# Altium PCB PCB6.PcbDoc
Units mil, origin at the board's own origin, x right, y up, seen from the top; angles counter-clockwise.
Board outline 5996.8 x 3553.34 mil, 2 copper layers (Top Layer, Bottom Layer); 78 components, 101 nets, 462 pads, 68 vias.
Unrouted connection lines stored in the file: 1.
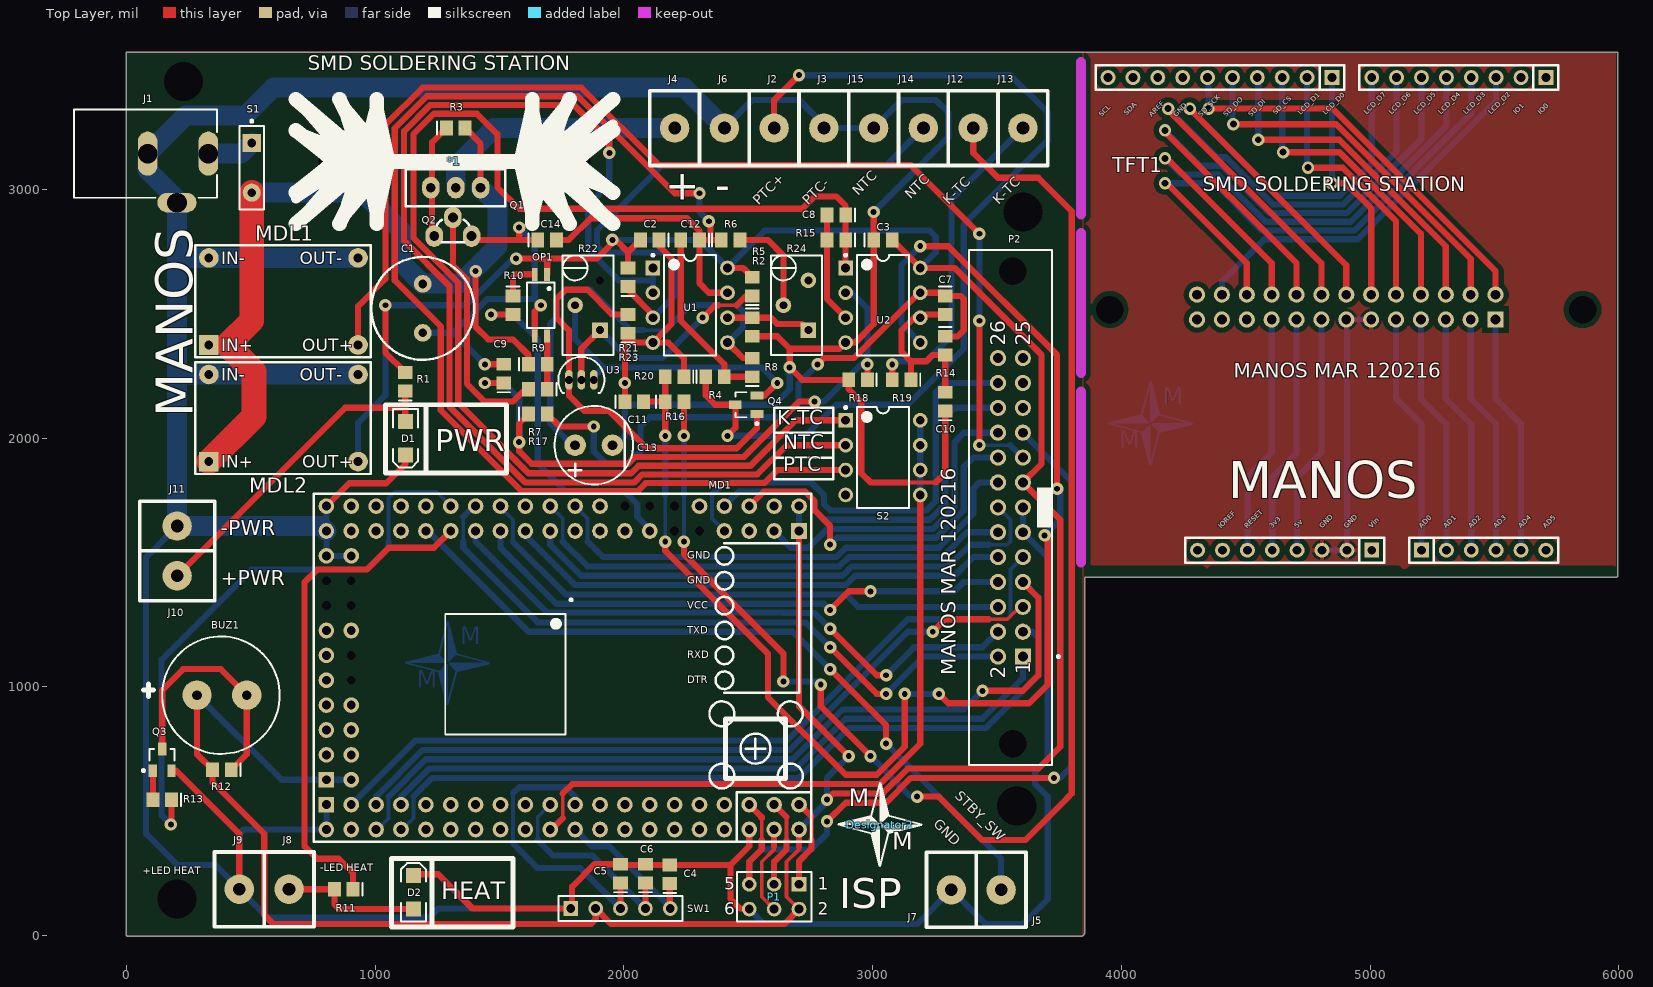
[diagram p0: Top Layer view]
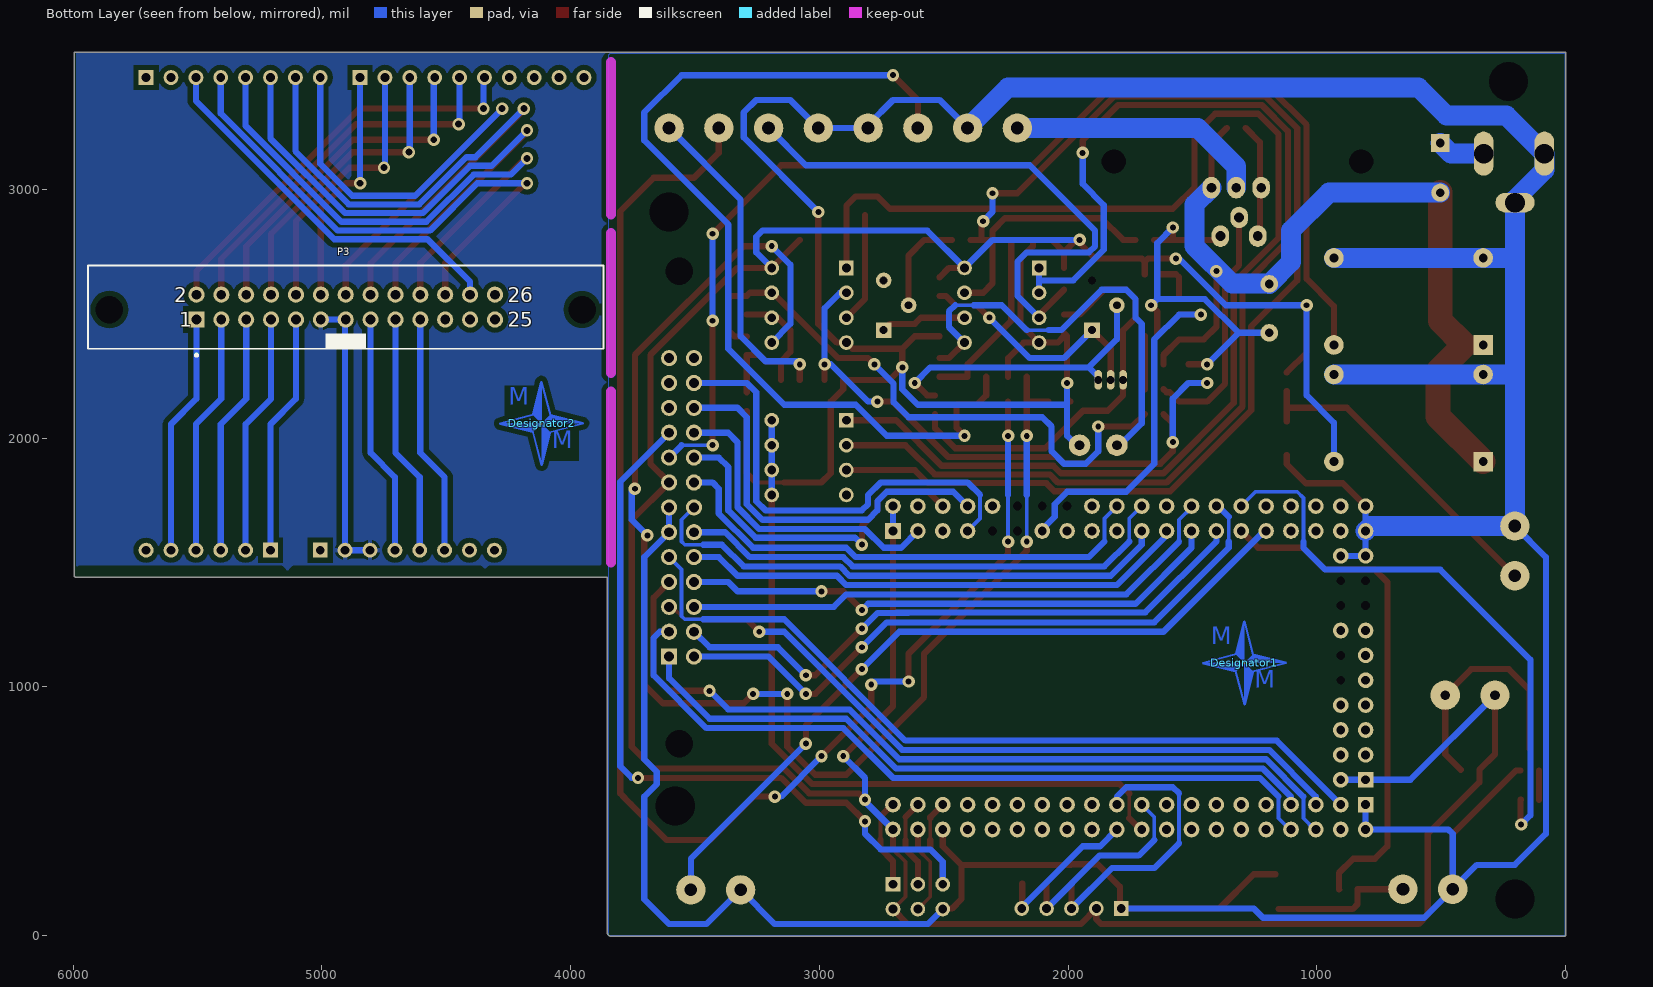
[diagram p1: Bottom Layer view, seen from below]

## Layer stack, top to bottom
Top Solder: solder mask 0.4, Solder Resist, Dk 3.5
Top Layer: signal copper 1.4
Dielectric1: dielectric 12.6, FR-4, Dk 4.8
Bottom Layer: signal copper 1.4
Bottom Solder: solder mask 0.4, Solder Resist, Dk 3.5

## Board outline
-1.18,3.84 -1.18,3547.15 cw(c3.84,3547.15) 3.84,3552.16 4603.84,3552.16 3838.84,3552.16 5990.61,3552.16 cw(c5990.61,3547.15) 5995.63,3547.15 5995.63,1447.15 cw(c5990.61,1447.15) 5990.61,1442.13 3851.62,1442.13 3851.62,9.1 cw(c3846.6,9.1) 3850.13,5.54 3850.15,5.56 3844.88,0.29 3844.9,0.31 cw(c3841.34,3.84) 3841.34,-1.18 3.84,-1.18 cw(c3.84,3.84)

## Design rules (kind name [scope] priority, off if disabled: settings)
Clearance [All] p1: gap=10
ComponentClearance [All] p1 off: gap=10 collisioncheckmode=3 verticalgap=10 showdistances=FALSE
FabricationTestPointUsage TestPointUsage [All] p1: valid=0 allowmultiple=FALSE
FabricationTestpoint Testpoint [(IsPad And (OnTopLayer Or OnBottomLayer))] p1: side=3 testpointundercomponent=TRUE minsize=40 maxsize=100 preferedsize=60 minholesize=0 maxholesize=40 preferedholesize=32 testpointgrid=1 allowsidetop=TRUE allowsidebottom=TRUE usegrid=TRUE gridtolerance=0.01
HoleSize [All] p1: absolutevalues=TRUE maxlimit=500 minlimit=1 maxpercent=80.000 minpercent=20.000
PolygonConnect [All] p1: connectstyle=Relief reliefconductorwidth=20 reliefentries=4 polygonreliefangle="90 Angle" airgapwidth=10
RoutingVias [All] p1: holewidth=28 width=50 viastyle="Through Hole" minholewidth=28 minwidth=50 maxholewidth=28 maxwidth=50
SolderMaskExpansion [All] p1: expansion=4
UnpouredPolygon [All] p1: allowunpoured=FALSE
Width [All] p1: maxlimit=500 minlimit=5 preferedwidth=25 minimp=50.000000 maximp=50.000000 favimp=50.000000
25 further rules are at their usual default settings.

## Classes and differential pairs
component class Sheet7: *1 BUZ1 C1 C2 C3 C4 C5 C6 C7 C8 C9 C10 C11 C12 C13 C14 D1 D2 J1 J2 J3 J4 J5 J6 J7 J8 J9 J10 J11 J12 J13 J14 J15 MD1 MDL1 MDL2 OP1 P3 Q2 Q3 Q4 R5 R6 R9 R10 R11 R12 R13 R14 R15 R16 R17 R18 R19 R20 R21 R22 R23 R24 S2 SW1 TFT1 U1 U2 U3

## Components (designator, comment, footprint, x,y, rotation, side; value= is the part's Value field where it differs from the comment)
*1 "HEAT-S1" "SK 104 HEATSHINK" 1306.25,3112.5 r180 top
BUZ1 "BUZZER" BUZZER 283.84,967.15 r0 top
C1 "2200uF/35V" RB5-10.5 1191.34,2522.15 r270 top
C2 "100nF" 0805 2103.84,2797.15 r180 top
C3 "100nF" 0805 3041.34,2797.15 r0 top
C4 "100nF" 0805 2183.84,247.15 r90 top
C5 "100nF" 0805 1986.34,249.65 r90 top
C6 "100nF" 0805 2086.34,249.65 r90 top
C7 "10nF" 0805 3291.34,2534.65 r270 top
C8 "10nF" 0805 2853.84,2897.15 r180 top
C9 "10nF" 0805 1516.34,2259.65 r90 top
C10 "10nF" 0805 3291.34,2147.15 r90 top
C11 "10nF" 0805 2041.34,2147.15 r0 top
C12 "47nF" 0805 2266.34,2797.15 r180 top
C13 "10uF/25V" RB-08 1803.84,1972.15 r180 top
C14 "10nF" 0805 1691.34,2797.15 r0 top
D1 "PWR" 1206D 1121.34,2067.15 r270 top
D2 "HEAT" 1206D 1153.84,107.15 r90 top
Designator1 "Comment" LOGO_Bottom_Layer 1291.34,1097.15 r0 top
Designator2 "Comment" LOGO_Top_Overlay 3028.84,447.15 r0 top
Designator2 "Comment" LOGO_Bottom_Layer 4116.34,2059.65 r0 top
J1 "PWR2.5" "POWER JACK" 163.84,2947.15 r0 top
J2 "PTC+" CON2 2603.84,3247.15 r0 top
J3 "PTC-" CON2 2803.84,3247.15 r0 top
J4 "+" CON2 2203.84,3247.15 r0 top
J5 "STBY_SW" CON2 3516.34,184.65 r180 top
J6 "-" CON2 2403.84,3247.15 r0 top
J7 "GND" CON2 3316.34,184.65 r180 top
J8 "-LED HEAT" CON2 653.84,187.15 r0 top
J9 "+LED HEAT" CON2 453.84,187.15 r0 top
J10 "+PWR" CON2 203.84,1447.15 r90 top
J11 "-PWR" CON2 203.84,1647.15 r90 top
J12 "K-TC" CON2 3403.84,3247.15 r0 top
J13 "K-TC" CON2 3603.84,3247.15 r0 top
J14 "NTC" CON2 3203.84,3247.15 r0 top
J15 "NTC" CON2 3003.84,3247.15 r0 top
MD1 "ATMEGA2860 CORE" "ATMEGA 2560 CORE" 2703.84,1627.15 r180 top
MDL1 "STEP DOWN CONVERTER" "STEP DOWN CONVERTER MINI" 331.25,2725 r0 top
MDL2 "STEP DOWN CONVERTER" "STEP DOWN CONVERTER MINI" 331.25,2256.25 r0 top
OP1 "PC814" SOP-4 1666.34,2534.65 r180 top
P1 "ISP" HDR2X3 2703.84,207.15 r180 top
P2 "Header 13X2" IDC2.54-V26A 3553.84,1722.15 r90 top
P3 "Header 13X2" IDC2.54-V26A 4903.84,2527.15 r180 bottom
Q1 "IRF9530" TO-220V 1223.84,3007.15 r0 top
Q2 "BS170" T0-92 1312.5,2887.5 r180 top
Q3 "MMBTA42" SO-G3 143.84,707.15 r0 top
Q4 "MMBTA92" SO-G3 2491.34,2134.65 r90 top
R1 "1K" 0805 1121.34,2227.15 r90 top
R2 "10K" 0805 2516.34,2447.15 r270 top
R3 "10K" 0805 1323.84,3247.15 r0 top
R4 "10K" 0805 2366.34,2247.15 r0 top
R5 "1K" 0805 2516.34,2609.65 r90 top
R6 "220K" 0805 2428.84,2797.15 r0 top
R7 "220R" 0805 1653.84,2197.15 r180 top
R8 "15K" 0805 2516.34,2284.65 r90 top
R9 "2K2" 0805 1653.84,2297.15 r0 top
R10 "330R" 0805 1553.84,2534.65 r270 top
R11 "1K" 0805 873.84,187.15 r180 top
R12 "1K" 0805 383.84,667.15 r180 top
R13 "4K7" 0805 143.84,547.15 r180 top
R14 "100K/1%" 0805 3291.34,2372.15 r270 top
R15 "24K/1%" 0805 2853.84,2797.15 r180 top
R16 "10K" 0805 2203.84,2147.15 r0 top
R17 "1K" 0805 1653.84,2097.15 r0 top
R18 "24K/1%" 0805 2941.34,2234.65 r180 top
R19 "10K" 0805 3116.34,2234.65 r180 top
R20 "100K/1%" 0805 2203.84,2247.15 r180 top
R21 "10K/1%" 0805 2016.34,2647.15 r90 top
R22 "5K" VR6#1 1903.84,2534.65 r90 top
R23 "120K" 0805 2016.34,2459.65 r90 top
R24 "100K" VR6#2 2741.34,2534.65 r90 top
S1 "SW-SPST" SPST-2 503.84,3087.15 r270 top
S2 "SW DIP-4" DIP-8 3041.34,1922.15 r0 top
SW1 "ENCODER" HDR1X5 1786.34,109.65 r0 top
TFT1 "2.4" "ARDUINO UNO" 4306.25,1550 r0 top
U1 "LT1013" DIP-8 2266.34,2534.65 r0 top
U2 "LT1013" DIP-8 3041.34,2534.65 r0 top
U3 "LM336" Z03A 1828.84,2234.65 r270 top

## Footprints (in the part's own frame and the unit in brackets; to place one, negate y for a bottom-side part, rotate by r counter-clockwise, add the part's x,y. Pads: shape width x height; smd on the part's side, far side on the other; paste and mask are expansions set on the pad)
0805 [mm] "Chip Capacitor; Body 2.0 x 1.2 mm (LxW typ)"
  rect 1.3x1.5 smd: 1(-0.95,0) 2(0.95,0)
  silkscreen extent -1.9,-0.65 -1.9,0.65
1206D [mil] "1206 DIODE (LED)"
  rect 60x60 smd: 1(0,0) 2(135,0)
  silkscreen extent -50,-50 185,50
"ARDUINO UNO" [mil]
  round 60 hole 35.43: 1(200,0) 2(300,0) 3(400,0) 4(500,0) 5(600,0) 7(1000,0) 8(1100,0) 9(1200,0) 10(1300,0) 11(1200,1900) 12(1100,1900) 13(1000,1900) 14(900,1900) 15(800,1900) 16(700,1900) 18(440,1900) 19(340,1900) 20(240,1900) 21(140,1900) 22(40,1900) R(-360,1900) R(-260,1900) R(-160,1900) R(-60,1900) R(0,0) R(100,0) R(1300,1900) R(1400,0)
  rect 60x60 hole 35.43: 6(900,0) 17(540,1900) R(700,0) R(1400,1900)
  silkscreen extent -410,-50 1450,1950
"ATMEGA 2560 CORE" [mm]
  rect 1.6x1.6 hole 0.9: 1(0,0) 41(48.26,27.94) 81(48.26,25.4)
  rect 0.3x2.1 on Top Overlay: 1(23.972,7.025) 2(24.472,7.025) 3(24.972,7.025) 4(25.472,7.025) 5(25.972,7.025) 6(26.472,7.025) 7(26.972,7.025) 8(27.472,7.025) 9(27.972,7.025) 10(28.472,7.025) 11(28.972,7.025) 12(29.472,7.025) 13(29.972,7.025) 14(30.472,7.025) 15(30.972,7.025) 16(31.472,7.025) 17(31.972,7.025) 18(32.472,7.025) 19(32.972,7.025) 20(33.472,7.025) 21(33.972,7.025) 22(34.472,7.025) 23(34.972,7.025) 24(35.472,7.025) 25(35.972,7.025) 51(35.972,22.225) 52(35.472,22.225) 53(34.972,22.225) 54(34.472,22.225) 55(33.972,22.225) 56(33.472,22.225) 57(32.972,22.225) 58(32.472,22.225) 59(31.972,22.225) 60(31.472,22.225) 61(30.972,22.225) 62(30.472,22.225) 63(29.972,22.225) 64(29.472,22.225) 65(28.972,22.225) 66(28.472,22.225) 67(27.972,22.225) 68(27.472,22.225) 69(26.972,22.225) 70(26.472,22.225) 71(25.972,22.225) 72(25.472,22.225) 73(24.972,22.225) 74(24.472,22.225) 75(23.972,22.225)
  round 1.6 hole 0.9: 2(0,-2.54) 3(2.54,0) 4(2.54,-2.54) 5(5.08,0) 6(5.08,-2.54) 7(7.62,0) 8(7.62,-2.54) 10(10.16,-2.54) 13(15.24,0) 15(17.78,0) 17(20.32,0) 18(20.32,-2.54) 19(22.86,0) 20(22.86,-2.54) 21(25.4,0) 22(25.4,-2.54) 23(27.94,0) 24(27.94,-2.54) 25(30.48,0) 26(30.48,-2.54) 27(33.02,0) 28(33.02,-2.54) 29(35.56,0) 30(35.56,-2.54) 31(38.1,0) 32(38.1,-2.54) 33(40.64,0) 34(40.64,-2.54) 35(43.18,0) 36(43.18,-2.54) 37(45.72,0) 38(45.72,-2.54) 39(48.26,0) 40(48.26,-2.54) 42(48.26,30.48) 43(45.72,27.94) 44(45.72,30.48) 45(43.18,27.94) 46(43.18,30.48) 47(40.64,27.94) 48(40.64,30.48) 49(38.1,27.94) 50(38.1,30.48) 51(35.56,27.94) 52(35.56,30.48) 53(33.02,27.94) 54(33.02,30.48) 55(30.48,27.94) 56(30.48,30.48) 57(27.94,27.94) 58(27.94,30.48) 59(25.4,27.94) 60(25.4,30.48) 61(22.86,27.94) 62(22.86,30.48) 63(20.32,27.94) 64(20.32,30.48) 65(17.78,27.94) 66(17.78,30.48) 67(15.24,27.94) 68(15.24,30.48) 69(12.7,27.94) 70(12.7,30.48) 71(10.16,27.94) 72(10.16,30.48) 73(7.62,27.94) 74(7.62,30.48) 75(5.08,27.94) 76(5.08,30.48) 77(2.54,27.94) 78(2.54,30.48) 79(0,27.94) 80(0,30.48) 82(45.72,25.4) 83(48.26,22.86) 84(45.72,22.86) 85(48.26,20.32) 86(45.72,20.32) 87(48.26,17.78) 88(45.72,17.78) 89(48.26,15.24) 91(48.26,12.7) 93(48.26,10.16) 94(45.72,10.16) 99(48.26,2.54) 100(45.72,2.54)
  round 0 hole 0.9: 9(10.16,0) 11(12.7,0) 12(12.7,-2.54) 14(15.24,-2.54) 16(17.78,-2.54) 90(45.72,15.24) 92(45.72,12.7) 95(48.26,7.62) 96(45.72,7.62) 97(48.26,5.08) 98(45.72,5.08)
  rect 2.1x0.3 on Top Overlay: 26(37.572,8.625) 27(37.572,9.125) 28(37.572,9.625) 29(37.572,10.125) 30(37.572,10.625) 31(37.572,11.125) 32(37.572,11.625) 33(37.572,12.125) 34(37.572,12.625) 35(37.572,13.125) 36(37.572,13.625) 37(37.572,14.125) 38(37.572,14.625) 39(37.572,15.125) 40(37.572,15.625) 41(37.572,16.125) 42(37.572,16.625) 43(37.572,17.125) 44(37.572,17.625) 45(37.572,18.125) 46(37.572,18.625) 47(37.572,19.125) 48(37.572,19.625) 49(37.572,20.125) 50(37.572,20.625) 76(22.372,20.625) 77(22.372,20.125) 78(22.372,19.625) 79(22.372,19.125) 80(22.372,18.625) 81(22.372,18.125) 82(22.372,17.625) 83(22.372,17.125) 84(22.372,16.625) 85(22.372,16.125) 86(22.372,15.625) 87(22.372,15.125) 88(22.372,14.625) 89(22.372,14.125) 90(22.372,13.625) 91(22.372,13.125) 92(22.372,12.625) 93(22.372,12.125) 94(22.372,11.625) 95(22.372,11.125) 96(22.372,10.625) 97(22.372,10.125) 98(22.372,9.625) 99(22.372,9.125) 100(22.372,8.625)
  silkscreen extent -1.27,-3.81 49.53,31.75
BUZZER [mm]
  round 3 hole 1: 1(0,0) 2(5.08,0)
  silkscreen extent -5.46,-6 8.44,6
CON2 [mm] "VERTICAL SIMPLE WITH SCREW"
  round 3 hole 1.3: 1(0,0)
  silkscreen extent -2.54,-3.83 2.54,3.81
DIP-8 [mm] "DIP; 8 Leads; Row Spacing 7.62 mm; Pitch 2.54 mm"
  rect 1.5x1.5 hole 0.9: 1(-3.81,3.81)
  round 1.5 hole 0.9: 2(-3.81,1.27) 3(-3.81,-1.27) 4(-3.81,-3.81) 5(3.81,-3.81) 6(3.81,-1.27) 7(3.81,1.27) 8(3.81,3.81)
  silkscreen extent -3.93,-5.15 2.65,5.23
HDR1X5 [mm] "Connector; Header; 5 Position"
  rect 1.5x1.5 hole 0.9: 1(0,0)
  round 1.5 hole 0.9: 2(2.54,0) 3(5.08,0) 4(7.62,0) 5(10.16,0)
  silkscreen extent -1.27,-1.27 11.43,1.27
HDR2X3 [mm] "Connector; Header; 3x2 Position"
  rect 1.5x1.5 hole 0.9: 1(0,0)
  round 1.5 hole 0.9: 2(0,2.54) 3(2.54,0) 4(2.54,2.54) 5(5.08,0) 6(5.08,2.54)
  silkscreen extent -1.27,-1.27 6.35,3.81
IDC2.54-V26A [mm] "Connector; IDC, Thru-Hole; 26 Position; Vertical; Pitch 2.54 mm; Body 52.60 x 8.5 x 17.30 mm (LxWxH), Without locking levers"
  rect 1.65x1.65 hole 1: 1(-15.24,-1.27)
  round 1.65 hole 1: 2(-15.24,1.27) 3(-12.7,-1.27) 4(-12.7,1.27) 5(-10.16,-1.27) 6(-10.16,1.27) 7(-7.62,-1.27) 8(-7.62,1.27) 9(-5.08,-1.27) 10(-5.08,1.27) 11(-2.54,-1.27) 12(-2.54,1.27) 13(0,-1.27) 14(0,1.27) 15(2.54,-1.27) 16(2.54,1.27) 17(5.08,-1.27) 18(5.08,1.27) 19(7.62,-1.27) 20(7.62,1.27) 21(10.16,-1.27) 22(10.16,1.27) 23(12.7,-1.27) 24(12.7,1.27) 25(15.24,-1.27) 26(15.24,1.27)
  round 2.5 hole 2.8 unplated: MH1(-24.13,-0.25) MH2(24.13,-0.25)
  silkscreen extent -26.3,-5.03 26.3,4.25
LOGO_Bottom_Layer [mm]
  rect 0.2x0.2 smd far side: 0(0,0)
  Bottom Layer region: -0.953,0.953 -0.117,0.117 -0.166,0 -4.243,0 -4.258,0.126
  Bottom Layer region: 0.953,-0.953 0.117,-0.117 0.166,0 4.243,0 4.258,-0.126
  Bottom Layer region: -0.953,-0.953 -0.117,-0.117 0,-0.166 0,-4.243 -0.126,-4.258
  Bottom Layer region: 0.953,0.953 0.117,0.117 0,0.166 0,4.243 0.126,4.258
  Bottom Layer lines w0.2: -4.243,0 -0.635,-0.953 ; -0.953,0.635 0,4.243 ; 0,-4.243 0.953,-0.635 ; 0.635,0.953 4.243,0
LOGO_Top_Overlay [mm]
  rect 0.2x0.2 on Top Overlay: 0(0,0)
  silkscreen extent -4.26,-4.26 4.26,4.26
"POWER JACK" [mm]
  oval 2x4.5 hole 2: 1(4.2,5) 2(-2,5)
  oval 4x2 hole 2: 3(1,0)
  silkscreen extent -9.5,0.5 5.1,9.5
RB5-10.5 [mm] "Capacitor (Radial); 2 Leads"
  round 1.8 hole 0.9: 1(-2.5,0) 2(2.5,0)
  silkscreen extent -5.25,-5.25 5.25,5.25
RB-08 [mm]
  round 2.2 hole 1: 1(0,0) 2(-3.81,0)
  silkscreen extent -5.92,-4.02 2.11,4.02
"SK 104 HEATSHINK" [mm]
  round 2 hole 2.5: 0(-12.954,0) 0(12.319,0)
  silkscreen extent -16.51,-6.35 15.88,6.35
SO-G3 [mm]
  rect 0.85x1.3 smd: 1(-0.95,-1.1) 2(0.95,-1.1) 3(0,1.1)
  silkscreen extent -2.05,-1.22 1.28,1.1
SOP-4 [mm]
  rect 0.6x1.3 smd: 1(-0.635,-3.15) 2(0.635,-3.15) 3(0.635,3.15) 4(-0.635,3.15)
  silkscreen extent -1.4,-2.3 1.4,2.3
SPST-2 [mm] "Circuit Breaker; 2 Leads"
  rect 1.85x1.85 hole 0.9: 1(-2.54,0)
  round 1.85 hole 0.9: 2(2.54,0)
  silkscreen extent -4.89,-1.27 4.28,1.27
"STEP DOWN CONVERTER MINI" [mm]
  rect 2x2 hole 0.9: 1(0,-8.89)
  round 2 hole 0.9: 2(0,0) 3(15.24,0) 4(15.24,-8.89)
  silkscreen extent -1.4,-10.16 16.51,1.27
T0-92 [mm] "TO - 92 PACK"
  oval 1.8x2.2 hole 1: 1(0,0) 2(1.905,1.905) 3(-1.905,1.905)
  silkscreen extent -1.67,0.23 1.67,2.54
TO-220V [mm]
  oval 1.8x2.2 hole 1: 1(0,0) 2(2.54,0) 3(5.08,0)
  silkscreen extent -2.54,-1.91 7.62,3.17
VR6#1 [mm]
  rect 1.6x1.6 hole 0.8: 1(-2.54,0)
  round 1.6 hole 0.8: 2(0,2.54)
  round 0 hole 0.8: 3(2.54,0)
  silkscreen extent -5.08,-1.4 5.08,3.81
VR6#2 [mm]
  rect 1.6x1.6 hole 0.8: 1(-2.54,0)
  round 1.6 hole 0.8: 2(0,2.54) 3(2.54,0)
  silkscreen extent -5.08,-1.4 5.08,3.81
Z03A [mm] "TO, Flat Index; 3 In-Line, Axial Leads; Body Dia. 4.6mm; Leads 0.53 x 0.39 mm (max)"
  oval 2x0.762 hole 0.8: 1(0,1.27) 2(0,0) 3(0,-1.27)
  silkscreen extent -2.34,-2.34 1.35,2.34

## Part data
C1 C13: library part "Cap Pol1", "Polarized Capacitor (Radial)"
C2 C3 C7 C8 C9 C10 C11 C12 C14: library part D-101-0085, "Capacitor, Ceramic, 4.7uF 10% 16V 0805 (2012) X7R"
C4 C5 C6: library part Cap, "Capacitor"
D1 D2: library part LED0, "Typical INFRARED GaAs LED"
J1: "Low Voltage Power Supply Connector"
J2 J3 J4 J5 J6 J7 J8 J9 J10 J11 J12 J13 J14 J15: library part CON1_S
MD1: library part "ATMEGA2560 CORE"
OP1: library part OPTO-AC1, "AC OPTOCUPLER"
P1: library part "Header 3X2", "Header, 3-Pin, Dual row"
P2 P3: "Header, 13-Pin, Dual row"
Q1: library part PMOS-2, "P-Channel Power MOSFET"
Q2: library part NMOS-2, "N-Channel Power MOSFET"
Q3: library part NPN, "NPN Bipolar Transistor"
Q4: library part PNP, "PNP Bipolar Transistor"
R1 R3 R7 R11: library part Res2, "Resistor"
R2 R4 R5 R6 R8 R9 R10 R12 R13 R14 R15 R16 R17 R18 R19 R20 R21 R23: library part RES
R22 R24: library part RPot2
S1: "Single-Pole, Single-Throw Switch"
S2: "DIP Switch, 4 Position, SPST"
SW1: library part "ROTARY ENC"
TFT1: library part "2.4 TFT SHIELD MCUFRIEND"
U1 U2: library part LT1013ACJ8, "Dual Precision Operational Amplifier"
U3: library part LM385Z, "Adjustable Micropower Voltage Reference"

## Free pads (board coordinates)
  round 0 hole 157.48: H(203.84,147.15) H(228.84,3434.65) H(3578.84,522.15) H(3603.84,2909.65)

## Via types
v1: diameter 50, hole 23.62, Top Layer to Bottom Layer, tented both sides, 57 vias
v2: diameter 50, hole 28, Top Layer to Bottom Layer, 11 vias

## Nets (pads, with @x,y where several pads share a name; then routed paths per layer and width w, separated by ;. In a path a pad name is that pad's centre, name@x,y a point inside that pad or via, vN(x,y) a via of type N, cw(c..) or ccw(c..) an arc to the next point about the centre after c; other vN are vias at no path point)
+3.3V: MDL1.4 P2.17 | length 4668.9
  Top Layer w25: MDL1.4 931.25,2531.25 1041.34,2641.34 1041.34,3259.65 1191.34,3409.65 1828.84,3409.65 2141.34,3097.15 3153.84,3097.15 v1(3428.84,2822.15) ; v1(3428.84,1972.15) v1(3428.84,2472.15)
  Bottom Layer w15: v1(3428.84,1972.15) 3553.84,1972.15
  Bottom Layer w25: v1(3428.84,2472.15) v1(3428.84,2822.15) ; 3553.84,1972.15 P2.17
+3.3V_A: P3.17 TFT1.2 | length 967.6
  Bottom Layer w25: TFT1.2 4606.25,1843.75 4703.84,1941.34 P3.17
+5V: BUZ1.1 C2.2 C3.2 MD1.1@2703.84,1627.15 MD1.2@2703.84,1727.15 MD1.80@2703.84,427.15 MD1.81@803.84,627.15 MD1.82@903.84,627.15 MDL2.4 OP1.1 P1.2 P2.15 R1.2 R5.2 R12.2 R21.2 SW1.2 U1.8 U2.8 | length 13284.2
  Top Layer w15: P1.2 2653.84,157.15 2653.84,297.15 2703.84,347.15
  Top Layer w25: BUZ1.1 283.84,729.74 R12.2 346.44,617.05 553.84,409.65 553.84,84.65 591.34,47.15 1866.34,47.15 1886.34,67.15 SW1.2 1948.84,47.15 2643.84,47.15 P1.2 ; v1(1041.34,2534.65) 1041.34,2344.55 R1.2 ; v1(1566.34,2722.15) 1678.84,2722.15 1691.34,2709.65 ; OP1.1 1691.34,2709.65 ; R21.2 2016.34,2747.05 ; C2.2 2016.34,2747.05 ; U1.8 2478.74,2684.65 R5.2 ; 2703.84,359.65 MD1.80@2703.84,427.15 ; MD1.1@2703.84,1627.15 2703.84,922.15 v1(2903.84,722.15) ; v1(2816.34,547.15) 2841.34,572.15 3041.34,572.15 3141.34,672.15 3666.34,672.15 3753.84,759.65 3753.84,1672.15 P2.15 3678.84,1897.15 3678.84,2334.65 3328.84,2684.65 3191.24,2684.65 C3.2 ; 1691.34,2709.65 1703.84,2722.15 1891.24,2722.15 1966.24,2797.15 2016.34,2747.05
  Bottom Layer w25: BUZ1.1 623.84,627.15 MD1.82@903.84,627.15 ; MDL2.4 931.25,2062.5 1041.34,2172.59 v1(1041.34,2534.65) 1366.34,2534.65 1553.84,2722.15 v1(1566.34,2722.15) ; v1(1953.84,2797.15) 2303.84,2797.15 U1.8 2566.34,2834.65 3228.84,2834.65 3253.84,2809.65 3253.84,2747.15 U2.8 ; MD1.80@2703.84,427.15 2816.34,539.65 2816.34,634.65 v1(2903.84,722.15) ; MD1.1@2703.84,1627.15 MD1.2@2703.84,1727.15
+5V_A: P3.15 TFT1.3 | length 967.6
  Bottom Layer w25: TFT1.3 4706.25,1843.75 4803.84,1941.34 P3.15
+IN: C1.1 MDL1.1 MDL2.1 Q1.3 R3.2 R9.1 S1.2 | length 3567.2
  Top Layer w25: R3.2 1423.84,3184.55 Q1.3 ; v1(1403.84,2672.15) 1403.84,2447.15 1453.84,2397.15 1553.84,2397.15 1616.44,2334.55 R9.1
  Top Layer w100: MDL2.1 512.5,2087.5 512.5,2268.75 406.25,2375 503.84,2472.59 S1.2
  Bottom Layer w80: S1.2 951.34,2987.15 1103.84,2834.65 1103.84,2708.07 C1.1 1192.91,2622.15 1341.34,2622.15 1491.34,2772.15 1491.34,2939.65 Q1.3
BUZZER_PIN: MD1.30@1303.84,1727.15 R13.1 | length 2364.5
  Top Layer w25: v1(178.84,447.15) 181.24,449.55 R13.1 R13.1@178.84,547.15
  Bottom Layer w15: 1053.84,1584.65 1053.84,1759.65 1078.84,1784.65 1246.34,1784.65 MD1.30@1303.84,1727.15
  Bottom Layer w25: v1(178.84,447.15) 141.34,484.65 141.34,1109.65 503.84,1472.15 966.34,1472.15 1053.84,1559.65 1053.84,1584.65
ENCODER1CHNA: C6.1 MD1.59@1703.84,527.15 SW1.4 | length 812.2
  Top Layer w25: SW1.4 C6.1
  Bottom Layer w15: 1653.84,384.65 1653.84,477.15 MD1.59@1703.84,527.15
  Bottom Layer w25: 1653.84,384.65 1716.34,322.15 1873.84,322.15 SW1.4
ENCODER1CHNB: C4.1 MD1.62@1803.84,427.15 SW1.5 | length 602.5
  Top Layer w25: C4.1 2183.84,112.15 SW1.5
  Bottom Layer w25: MD1.62@1803.84,427.15 1871.34,359.65 1941.34,359.65 SW1.5@2178.84,122.15
ENCODERDETENT: C5.1 MD1.61@1803.84,527.15 SW1.3 | length 1152.2
  Top Layer w25: SW1.3 C5.1
  Bottom Layer w15: 1553.84,372.15 1553.84,572.15
  Bottom Layer w25: 1553.84,372.15 1653.84,272.15 1823.84,272.15 SW1.3 ; 1553.84,572.15 1578.84,597.15 1766.34,597.15 1803.84,559.65 MD1.61@1803.84,527.15
GND: C1.2 C2.1 C3.1 C4.2 C5.2 C6.2 C9.2 C10.1 C11.1 C13.2 C14.1 D1.2 D2.2 J1.2 J1.3 J3.1 J6.1 J7.1 J9.1 J11.1 J15.1 MD1.39@803.84,1627.15 MD1.40@803.84,1727.15 MD1.41@803.84,527.15 MD1.42@803.84,427.15 MD1.76@2503.84,427.15 MD1.99@803.84,1527.15 MD1.100@903.84,1527.15 MDL1.2 MDL1.3 MDL2.2 MDL2.3 OP1.3 P1.6 P2.11 P2.13 Q2.3 Q3.2 R2.2 R18.2 R20.1 R23.1 SW1.1 U1.4 U2.4 | length 23807.3
  Top Layer w15: 3141.34,1822.15 3253.84,1822.15
  Top Layer w25: Q3.2 199.65,663.84 453.84,409.65 J9.1 ; MD1.40@803.84,1727.15 895.44,1818.75 1043.75,1818.75 1121.34,1896.34 D1.2 ; D2.2@1166.34,247.15 1253.84,247.15 1391.34,109.65 SW1.1 1791.34,114.65 1791.34,197.15 1881.24,287.05 C5.2 1988.84,284.55 2428.74,284.55 ; Q2.3 1402.85,2797.15 1578.84,2797.15 ; v1(1441.34,2297.15) 1516.34,2297.15 C9.2 ; v1(1578.84,2847.15) 1578.84,2797.15 ; OP1.3 1641.34,2509.65 v1(1666.34,2534.65) ; C14.1 1578.84,2797.15 ; C11.1@1991.34,2147.15 2003.84,2159.65 2003.84,2409.74 R23.1 2016.34,2409.65 2041.34,2384.65 2178.84,2384.65 2241.24,2322.24 R20.1 ; U1.4 2191.34,2459.65 2191.34,2722.15 2141.24,2772.24 C2.1 ; 2316.34,284.55 2316.34,284.65 ; P1.6 2501.34,109.65 2466.34,109.65 2428.74,147.24 2428.74,284.55 ; MD1.76@2503.84,427.15 2503.84,359.65 2428.74,284.55 ; R2.2 2616.24,2409.74 2666.34,2359.65 ; v1(3003.94,2909.55) C3.1 3003.94,2459.74 2928.84,2384.65 U2.4 2866.34,2359.65 2666.34,2359.65 ; 3141.34,1822.15 2991.34,1822.15 2953.84,1859.65 2953.84,2147.15 2903.94,2197.05 R18.2 2716.34,2234.65 v1(2666.34,2284.65) 2666.34,2359.65 ; 3253.84,1822.15 3291.34,1859.65 C10.1
  Bottom Layer w25: J11.1 78.84,1522.15 78.84,409.65 203.84,284.65 356.34,284.65 568.84,72.15 1216.34,72.15 1253.84,109.65 SW1.1 ; J9.1 453.84,409.65 471.34,427.15 803.84,427.15 MD1.41@803.84,527.15 ; MD1.40@803.84,1727.15 803.84,1627.15 803.84,1527.15 MD1.100@903.84,1527.15 ; C1.2 1314.76,2423.72 ; v1(1441.34,2297.15) 1314.76,2423.72 ; v1(1578.84,2847.15) 1641.34,2784.65 1641.34,2559.65 ; v1(1666.34,2534.65) 1641.34,2559.65 ; C13.2@1953.84,1959.65 2003.84,2009.65 v1(2003.84,2222.15) ; 2003.84,2134.65 2603.84,2134.65 2666.34,2197.15 v1(2666.34,2284.65) ; J6.1 2516.34,3359.65 2703.84,3359.65 2803.84,3259.65 J3.1 J15.1 3116.34,3359.65 3253.84,3359.65 3303.84,3309.65 3303.84,3209.45 v1(3003.94,2909.55) ; P1.6 2563.84,47.15 3178.84,47.15 J7.1 3453.84,47.15 3603.84,47.15 3703.84,147.15 3703.84,559.65 3653.84,609.65 3653.84,659.65 3703.84,709.65 3703.84,1522.15 P2.11 P2.13 ; 1314.76,2423.72 1450.69,2559.65 1641.34,2559.65
  Bottom Layer w80: MD1.39@803.84,1627.15 783.84,1647.15 J11.1 203.84,2256.25 ; MDL2.3 MDL2.2 203.84,2256.25 ; MDL1.3 MDL1.2 203.84,2725 ; J6.1 2241.34,3409.65 591.34,3409.65 478.84,3297.15 238.25,3297.15 J1.2 85.1,3078.39 203.84,2959.65 203.84,2725 ; 203.84,2256.25 203.84,2725
GND_A: P3.11 P3.13 TFT1.4 TFT1.5 | length 1128.1
  Bottom Layer w25: TFT1.4 TFT1.5 4906.25,2474.73 P3.13 P3.11
HEAT_LED: MD1.29@1303.84,1627.15 R11.1 | length 2047.8
  Top Layer w15: R11.1@903.84,184.65 908.74,184.65 R11.1
  Top Layer w25: R11.1 911.24,252.24 853.84,309.65 766.34,309.65 716.34,359.65 716.34,1422.15 766.34,1472.15 966.34,1472.15 1053.84,1559.65 1236.34,1559.65 MD1.29@1303.84,1627.15
K-TC_OUT: C8.1 R15.1 S2.1 U2.1 | length 5257.9
  Top Layer w25: S2.1 2691.34,2072.15 2508.84,1889.65 2058.84,1889.65 2028.84,1859.65 1616.34,1859.65 1333.84,2142.15 1333.84,2625.47 1153.84,2805.47 1153.84,3222.15 1236.34,3304.65 1408.84,3304.65 1491.34,3222.15 1491.34,3009.65 1578.84,2922.15 2716.34,2922.15 2766.34,2972.15 2853.84,2972.15 2891.24,2934.74 C8.1 R15.1 2891.24,2684.74 U2.1
LCD_CS: MD1.48@1103.84,427.15 P2.3 | length 3093.4
  Bottom Layer w15: MD1.48@1103.84,427.15 1108.84,427.15 1153.84,472.15 1153.84,559.65
  Bottom Layer w25: 1153.84,559.65 1228.84,634.65 2703.84,634.65 2903.84,834.65 3453.84,834.65 3666.34,1047.15 3666.34,1197.15 3641.34,1222.15 P2.3
LCD_CS_A: P3.3 TFT1.9 | length 969.6
  Bottom Layer w25: P3.3 5403.84,2158.66 5506.25,2056.25 TFT1.9
LCD_D0: MD1.22@1703.84,1727.15 P2.12 | length 2011.6
  Bottom Layer w15: MD1.22@1703.84,1727.15 1753.84,1677.15 1753.84,1584.65
  Bottom Layer w25: 1753.84,1584.65 1853.84,1484.65 2866.34,1484.65 2903.84,1522.15 3278.84,1522.15 3378.84,1622.15 P2.12
LCD_D0_A: P3.12 TFT1.17 | length 971.1
  Top Layer w25: v2(4846.25,3025) 4902.51,3025 5003.84,2923.67 P3.12
  Bottom Layer w25: v2(4846.25,3025) TFT1.17
LCD_D1: MD1.23@1603.84,1627.15 P2.10 | length 2046.9
  Bottom Layer w25: MD1.23@1603.84,1627.15 1603.84,1609.65 1803.84,1409.65 2891.34,1409.65 2928.84,1447.15 3328.84,1447.15 3403.84,1522.15 P2.10
LCD_D1_A: P3.10 TFT1.18 | length 1102.7
  Top Layer w25: v2(4750,3087.5) 4889.51,3087.5 5103.84,2873.17 P3.10
  Bottom Layer w25: TFT1.18 4746.25,3091.25 v2(4750,3087.5)
LCD_D2: MD1.7@2403.84,1627.15 P2.24 | length 1873.6
  Bottom Layer w15: 2353.84,1772.15 2353.84,1677.15 MD1.7@2403.84,1627.15
  Bottom Layer w25: 2353.84,1772.15 2403.84,1822.15 2753.84,1822.15 2803.84,1772.15 2803.84,1734.65 2828.84,1709.65 3216.34,1709.65 3253.84,1747.15 3253.84,2184.65 3291.34,2222.15 P2.24
LCD_D2_A: P3.24 TFT1.11 | length 1549.2
  Bottom Layer w25: P3.24 4403.84,2628.84 4575,2800 4950,2800 5506.25,3356.25 TFT1.11
LCD_D3: MD1.8@2403.84,1727.15 P2.22 | length 1583.8
  Bottom Layer w25: MD1.8@2403.84,1727.15 2461.34,1784.65 2728.84,1784.65 2766.34,1747.15 2766.34,1709.65 2803.84,1672.15 3228.84,1672.15 3291.34,1734.65 3291.34,2084.65 3328.84,2122.15 P2.22
LCD_D3_A: P3.22 TFT1.12 | length 2237.8
  Top Layer w25: v2(4175,3025) 4182.82,3025 4503.84,2703.99 P3.22
  Bottom Layer w25: v2(4175,3025) 4375,3025 4565,2835 4935.5,2835 5406.25,3305.75 TFT1.12
LCD_D4: MD1.3@2603.84,1627.15 P2.20 | length 1273.3
  Bottom Layer w25: MD1.3@2603.84,1627.15 2671.34,1559.65 2741.34,1559.65 2816.34,1634.65 3241.34,1634.65 3328.84,1722.15 3328.84,1984.65 3366.34,2022.15 P2.20
LCD_D4_A: P3.20 TFT1.13 | length 2321.3
  Top Layer w25: v2(4175,3125) 4182.82,3125 4603.84,2703.99 P3.20
  Bottom Layer w25: v2(4175,3125) 4240,3060 4389.5,3060 4579.5,2870 4921.01,2870 5306.25,3255.24 TFT1.13
LCD_D5: MD1.6@2503.84,1727.15 P2.18 | length 1425.2
  Top Layer w25: MD1.6@2503.84,1727.15 2561.34,1784.65 2728.84,1784.65 2766.34,1747.15 2766.34,1709.65 2828.84,1647.15 v1(2828.84,1572.15)
  Bottom Layer w25: v1(2828.84,1572.15) 2856.34,1599.65 3256.34,1599.65 3366.34,1709.65 3366.34,1884.65 3403.84,1922.15 P2.18
LCD_D5_A: P3.18 TFT1.14 | length 2417.8
  Top Layer w25: v2(4175,3237.5) 4175,3232.82 4703.84,2703.99 P3.18
  Bottom Layer w25: v2(4175,3237.5) 4317.5,3095 4403.99,3095 4593.99,2905 4906.51,2905 5206.25,3204.74 TFT1.14
LCD_D6: MD1.20@1803.84,1727.15 P2.16 | length 2021.9
  Bottom Layer w15: MD1.20@1803.84,1727.15 1853.84,1677.15 1853.84,1584.65
  Bottom Layer w25: 1853.84,1584.65 1916.34,1522.15 2853.84,1522.15 2891.34,1559.65 3266.34,1559.65 3403.84,1697.15 3403.84,1797.15 3428.84,1822.15 P2.16
LCD_D6_A: P3.16 TFT1.15 | length 2467.8
  Top Layer w25: v2@4182.82,3325 4803.84,2703.99 P3.16
  Bottom Layer w25: v2(4187.5,3325) 4382.5,3130 4418.49,3130 4608.49,2940 4892.01,2940 5106.25,3154.24 TFT1.15
LCD_D7: MD1.21@1703.84,1627.15 P2.14 | length 2166.9
  Bottom Layer w15: 3466.34,1572.15 3541.34,1572.15 3553.84,1584.65 3553.84,1672.15 P2.14
  Bottom Layer w25: MD1.21@1703.84,1622.15 1703.84,1572.15 1828.84,1447.15 2878.84,1447.15 2916.34,1484.65 3303.84,1484.65 3391.34,1572.15 3466.34,1572.15
LCD_D7_A: P3.14 TFT1.16 | length 2284.1
  Top Layer w25: v2(4275,3325) 4903.84,2696.16 P3.14
  Bottom Layer w25: v2(4275,3325) 4625,2975 4877.51,2975 5006.25,3103.74 TFT1.16
LCD_RD: MD1.43@903.84,527.15 P2.9 | length 3222
  Bottom Layer w15: 3466.34,1272.15 3541.34,1272.15 3553.84,1284.65 3553.84,1472.15 P2.9
  Bottom Layer w25: MD1.43@903.84,527.15 1161.34,784.65 2653.84,784.65 3141.34,1272.15 3466.34,1272.15
LCD_RD_A: P3.9 TFT1.6 | length 969.6
  Bottom Layer w25: P3.9 5103.84,2158.66 5206.25,2056.25 TFT1.6
LCD_RS: MD1.45@1003.84,527.15 P2.5 | length 2948.3
  Top Layer w15: 3466.34,1272.15 3541.34,1272.15 3591.34,1322.15 P2.5
  Top Layer w25: v1(3241.34,1222.15) 3291.34,1272.15 3466.34,1272.15
  Bottom Layer w25: MD1.45@1003.84,527.15 1003.84,559.65 1191.34,747.15 2666.34,747.15 3141.34,1222.15 v1(3241.34,1222.15)
LCD_RS_A: P3.5 TFT1.8 | length 969.6
  Bottom Layer w25: P3.5 5303.84,2158.66 5406.25,2056.25 TFT1.8
LCD_RST: MD1.47@1103.84,527.15 P2.1 | length 2816.8
  Bottom Layer w25: MD1.47@1103.84,527.15 1103.84,559.65 1216.34,672.15 2691.34,672.15 2891.34,872.15 3441.34,872.15 3603.84,1034.65 P2.1
LCD_RST_A: P3.1 TFT1.10 | length 969.6
  Bottom Layer w25: P3.1 5503.84,2158.66 5606.25,2056.25 TFT1.10
LCD_WR: MD1.46@1003.84,427.15 P2.7 | length 3371.5
  Top Layer w25: v1(3441.34,984.65) 3603.84,984.65 3666.34,1047.15 3666.34,1359.65 P2.7
  Bottom Layer w15: MD1.46@1003.84,427.15 1008.84,427.15 1053.84,472.15 1053.84,559.65
  Bottom Layer w25: 1053.84,559.65 1203.84,709.65 2678.84,709.65 2878.84,909.65 3366.34,909.65 v1(3441.34,984.65)
LCD_WR_A: P3.7 TFT1.7 | length 969.6
  Bottom Layer w25: P3.7 5203.84,2158.66 5306.25,2056.25 TFT1.7
MISO: MD1.79@2703.84,527.15 P1.1 | length 356.4
  Top Layer w15: 2753.84,387.15 2753.84,474.65
  Top Layer w25: P1.1@2703.84,209.65 2703.84,299.65 2753.84,349.65 2753.84,387.15 ; MD1.79@2703.84,529.65 2753.84,479.65
MOSI: MD1.78@2603.84,427.15 P1.4 | length 361.4
  Top Layer w15: P1.4 2553.84,157.15 2553.84,297.15 2603.84,347.15 2603.84,359.65
  Top Layer w25: 2603.84,359.65 MD1.78@2603.84,427.15
NetBUZ1_2: BUZ1.2 Q3.3 R12.1 | length 981.3
  Top Layer w25: Q3.3 143.84,987.15 228.84,1072.15 378.84,1072.15 BUZ1.2 483.84,729.74 R12.1
NetC7_1: C7.1 R14.1 R17.2 U2.7 | length 2424.6
  Top Layer w25: R17.2 1741.24,2047.15 v1(1878.84,2047.15) ; v1(2778.84,2297.15) 2803.84,2322.15 2924.16,2322.15 3186.66,2584.65 U2.7 3278.74,2584.65 C7.1 3291.44,2572.15 3353.84,2572.15 3366.34,2559.65 3366.34,2434.65 3341.24,2409.55 R14.1
  Bottom Layer w25: v1(1878.84,2047.15) 1878.84,1947.15 1928.84,1897.15 2016.34,1897.15 2066.34,1947.15 2066.34,2047.15 2103.84,2084.65 2641.34,2084.65 2701.34,2144.65 2701.34,2219.65 v1(2778.84,2297.15)
NetC7_2: C7.2 C10.2 R14.2 R19.1 U2.6 | length 714.7
  Top Layer w25: R19.1 3153.74,2309.55 3153.64,2309.65 ; C10.2 R14.2 3241.44,2334.74 3216.34,2309.65 3153.64,2309.65 ; C7.2 3203.94,2497.24 U2.6 3166.34,2484.65 3116.34,2434.65 3116.34,2346.95 3153.64,2309.65
NetC8_2: C8.2 R15.2 U2.3 | length 443.5
  Top Layer w25: C8.2 2816.44,2559.55 U2.3
NetC9_1: C9.1 R17.1 R18.1 U2.2 | length 2591.1
  Top Layer w25: v1(1441.34,2222.15) 1516.24,2222.15 C9.1 ; R17.1 1578.84,2059.55 v1(1578.84,1984.65) 1578.84,1947.15 1628.84,1897.15 2016.34,1897.15 2043.84,1924.65 2481.34,1924.65 2703.84,2147.15 v1(2766.34,2147.15) ; R18.1 2978.74,2309.55 2978.84,2309.45 v1(2978.84,2297.15)
  Bottom Layer w25: v1(1441.34,2222.15) 1516.34,2222.15 1578.84,2159.65 v1(1578.84,1984.65) ; v1(2766.34,2147.15) 2803.84,2147.15 2953.84,2297.15 v1(2978.84,2297.15) 2978.84,2522.15 2916.34,2584.65 U2.2
NetC11_2: C11.2 R16.1 R20.2 U2.5 | length 5648.3
  Top Layer w25: C11.2 R16.1 ; v1(2166.34,1584.65) 2166.34,1547.15 2578.84,1134.65 2578.84,959.65 2891.34,647.15 3016.34,647.15 3128.84,759.65 v1(3128.84,972.15) ; v1(2166.34,2009.65) 2166.44,2009.74 R16.1 ; R20.2 R16.1 ; v1(3191.34,2772.15) 3303.84,2772.15 3741.34,2334.65 v1(3741.34,1797.15) ; v1(3266.34,972.15) 3303.84,934.65 3628.84,934.65 3703.84,1009.65 3703.84,1597.15 v1(3691.34,1609.65)
  Bottom Layer w15: v1(2166.34,1584.65) 2166.34,1772.15
  Bottom Layer w25: 2166.34,1772.15 v1(2166.34,2009.65) ; v1(3128.84,972.15) v1(3266.34,972.15) ; U2.5 3116.34,2459.65 3116.34,2697.15 v1(3191.34,2772.15) ; v1(3691.34,1609.65) 3753.84,1672.15 3753.84,1784.65 v1(3741.34,1797.15)
NetC12_2: C12.2 R4.2 R8.1 | length 735.1
  Top Layer w25: C12.2 2228.84,2797.15 2228.84,2472.15 2403.84,2297.15 R4.2@2403.84,2247.24 ; R4.2 R4.2@2403.84,2247.24 ; R8.1 R4.2@2403.84,2247.24
NetC13_1: C13.1 R8.2 U1.5 | length 1813.2
  Top Layer w25: U1.5 2478.94,2322.05 R8.2
  Bottom Layer w15: 2078.84,2434.65 2166.34,2434.65 ; 2378.84,2534.65 2453.84,2534.65
  Bottom Layer w25: C13.1@1803.84,1959.65 1703.84,2059.65 1703.84,2459.65 1728.84,2484.65 1728.84,2559.65 1766.34,2597.15 1865.35,2597.15 2027.85,2434.65 2078.84,2434.65 ; 2166.34,2434.65 2266.34,2534.65 2378.84,2534.65 ; U1.5 2478.84,2447.15 2478.84,2509.65 2453.84,2534.65
NetD1_1: D1.1 J10.1 R1.1 | length 1319.7
  Top Layer w25: J10.1 878.84,2122.15 1121.34,2122.15 ; D1.1 R1.1
NetD2_1: D2.1 J8.1 R11.2 | length 568.3
  Top Layer w25: J8.1 R11.2 836.44,127.05 856.34,107.15 D2.1
NetIC1_1: 
NetIC1_2: 
NetIC1_3: 
NetIC1_4: 
NetIC1_5: 
NetIC1_6: 
NetIC1_7: 
NetIC1_9: 
NetIC1_10: 
NetIC1_11: 
NetIC1_12: 
NetIC1_14: 
NetIC1_15: 
NetJ1_1: J1.1 S1.1 | length 192.5
  Bottom Layer w80: J1.1 460.69,3144 S1.1
NetJ2_1: J2.1 Q4.3 R4.1 | length 3848.7
  Top Layer w25: R4.1 2328.84,2247.05 2328.84,2172.15 2366.34,2134.65 Q4.3 2448.03,2041.34 v1(2416.34,2009.65) ; J2.1 2603.84,3359.65 v1(2703.84,3459.65)
  Bottom Layer w25: v1(2416.34,2009.65) 2728.84,2009.65 2853.84,2134.65 3141.34,2134.65 3366.34,2359.65 3366.34,2859.65 3703.84,3197.15 3703.84,3309.65 3553.84,3459.65 v1(2703.84,3459.65)
NetJ4_1: J4.1 Q1.2 | length 1029.2
  Bottom Layer w80: Q1.2 1323.84,3092.15 1478.84,3247.15 J4.1
NetJ12_1: J12.1 R16.2 | length 5823.5
  Top Layer w25: v1@2241.24,2009.74 R16.2 ; v1(2241.34,1584.65) 2241.34,1534.65 2641.34,1134.65 v1(2641.34,1022.15) ; v1(2791.34,1009.65) 2791.34,922.15 v1(2991.34,722.15) ; v1(3178.84,559.65) 3266.34,559.65 3441.34,384.65 3613.09,384.65 3790.11,561.66 ; J12.1 3403.84,3147.15 3503.84,3047.15 3666.34,3047.15 3800.59,2912.89 3800.59,572.15 3757.47,529.03
  Bottom Layer w15: v1(2241.34,1584.65) 2241.34,1772.15
  Bottom Layer w25: 2241.34,1772.15 v1(2241.34,2009.65) ; v1(2641.34,1022.15) 2778.84,1022.15 v1(2791.34,1009.65) ; v1(2991.34,722.15) 3153.84,559.65 v1(3178.84,559.65)
NetJ13_1: J13.1 R19.2 | length 1303.2
  Top Layer w25: v1(3078.84,2297.15) 3078.94,2297.05 R19.2
  Bottom Layer w25: v1(3078.84,2297.15) 3091.34,2309.65 3216.34,2309.65 3316.34,2409.65 3316.34,2959.65 J13.1
NetJ14_1: J14.1 R21.1 U1.3 | length 2299.4
  Top Layer w25: R21.1@2016.34,2597.15 2116.34,2497.15 U1.3
  Bottom Layer w25: U1.3 2203.84,2572.15 2203.84,2709.65 2166.34,2747.15 1916.34,2747.15 1891.34,2772.15 1891.34,2834.65 2153.84,3097.15 3053.84,3097.15 J14.1
NetOP1_2: OP1.2 R10.1 | length 168.2
  Top Layer w25: R10.1 1553.84,2647.15 1566.34,2659.65 1640.35,2659.65 OP1.2
NetP1_3: 
NetP1_15: 
NetP1_16: 
NetQ1_1: Q1.1 Q2.2 R3.1 | length 462.1
  Top Layer w25: Q2.2 1228.84,2821.16 1228.84,3189.55 R3.1
NetQ2_1: Q2.1 R7.2 | length 989.5
  Top Layer w25: Q2.1 1312.5,2696.31 1368.84,2639.97 1368.84,2219.65 1441.34,2147.15 1553.84,2147.15 1591.34,2184.65 1603.94,2184.65 R7.2
NetQ3_1: Q3.1 R13.2 | length 116.7
  Top Layer w25: R13.2 Q3.1
NetQ4_1: Q4.1 R23.2 U3.3 | length 1686.8
  Top Layer w25: R23.2 2016.24,2497.15 1953.84,2497.15 1853.84,2597.15 1766.34,2597.15 1728.84,2559.65 1728.84,2484.65 1778.84,2434.65 1778.84,2172.15 1840.06,2110.93 1940.06,2110.93 2091.34,1959.65 2453.84,1959.65 2534.65,2040.45 Q4.1
NetQ4_2: Q4.2 R22.2 U3.1 | length 1190.5
  Top Layer w25: Q4.2 2566.24,2172.05 v1(2616.34,2222.15)
  Bottom Layer w25: R22.2 1803.84,2397.15 1916.34,2284.65 ; U3.1 1878.84,2247.15 1916.34,2284.65 ; v1(2616.34,2222.15) 2553.84,2284.65 1916.34,2284.65
NetR2_1: R2.1 R24.1 U1.6 | length 345.7
  Top Layer w25: U1.6 2516.24,2484.65 R2.1 2591.44,2484.55 2616.34,2459.65 2716.34,2459.65 R24.1
NetR5_1: R5.1 R22.1 U3.2 | length 993.8
  Top Layer w15: 2378.84,2534.65 2453.84,2534.65
  Top Layer w25: U3.2 1828.84,2359.65 R22.1 ; v1(2316.34,2484.65) 2366.34,2534.65 2378.84,2534.65 ; 2453.84,2534.65 2491.44,2572.24 R5.1
  Bottom Layer w25: R22.1 2016.34,2322.15 2153.84,2322.15 v1(2316.34,2484.65)
NetR6_2: R6.2 R24.2 | length 401
  Top Layer w25: R6.2 2578.84,2797.15 2641.34,2734.65 R24.2
NTC_OUT: S2.2 U1.1 U1.2 | length 4777.2
  Top Layer w25: v1(1941.34,3147.15) 1941.34,3197.15 1798.84,3339.65 1221.84,3339.65 1116.34,3234.14 1116.34,2793.48 1298.84,2610.98 1298.84,2127.15 1603.84,1822.15 2040.84,1822.15 2073.34,1854.65 2536.34,1854.65 2653.84,1972.15 S2.2
  Bottom Layer w25: v1(1941.34,3147.15) 1941.34,3022.15 1856.34,2937.15 1856.34,2757.65 1978.84,2635.15 1978.84,2634.65 2116.34,2634.65 ; U1.2 2116.34,2634.65 ; U1.1 2116.34,2634.65
PTC_OUT: C12.1 C14.2 R6.1 S2.3 U1.7 | length 5713.6
  Top Layer w25: C14.2 1778.84,2797.15 1866.34,2884.65 2253.84,2884.65 2303.74,2834.74 C12.1 ; v1(2303.84,2984.65) 2204.34,2984.65 1814.34,3374.65 1207.34,3374.65 1078.84,3246.14 1078.84,2634.65 1263.84,2449.65 1263.84,2112.15 1588.84,1787.15 2055.33,1787.15 2087.83,1819.65 2563.84,1819.65 2616.34,1872.15 S2.3 ; v1(2341.34,2872.15) 2347.59,2865.9 2347.59,2797.15 ; R6.1 2347.59,2797.15 ; U1.7 2341.34,2584.65 2303.74,2622.24 C12.1 ; C12.1 2347.59,2797.15
  Bottom Layer w25: v1(2303.84,2984.65) 2303.84,2909.65 v1(2341.34,2872.15)
PWM_OUT: OP1.4 R7.1 R9.2 | length 213.5
  Top Layer w25: R7.1 1691.34,2197.24 OP1.4
PWMPIN: MD1.13@2103.84,1627.15 R10.2 | length 1412
  Top Layer w25: v1(1466.34,2497.15) 1553.74,2497.15 R10.2
  Bottom Layer w25: v1(1466.34,2497.15) 1553.84,2497.15 1653.84,2397.15 1653.84,1897.15 1766.34,1784.65 2003.84,1784.65 2053.84,1734.65 2053.84,1684.65 2103.84,1634.65 MD1.13@2103.84,1627.15
RESET: MD1.75@2503.84,527.15 P1.5 P2.19 | length 3333.9
  Top Layer w15: 2553.84,384.65 2553.84,472.15
  Top Layer w25: P1.5 2503.84,297.15 2553.84,347.15 2553.84,384.65 ; MD1.75@2503.84,527.15 2553.84,477.15 2553.84,472.15 ; v1(2816.34,459.65) 2891.34,534.65 3053.84,534.65 3153.84,634.65 v1(3728.84,634.65)
  Bottom Layer w25: P1.5 2503.84,297.15 2553.84,347.15 2753.84,347.15 2816.34,409.65 v1(2816.34,459.65) ; P2.19 3800.59,1825.39 3800.59,681.4 3753.84,634.65
RESET_A: P3.19 TFT1.1 | length 967.6
  Bottom Layer w25: TFT1.1 4506.25,1843.75 4603.84,1941.34 P3.19
SCK: MD1.77@2603.84,527.15 P1.3 | length 356.4
  Top Layer w15: 2653.84,384.65 2653.84,472.15
  Top Layer w25: P1.3 2603.84,297.15 2653.84,347.15 2653.84,384.65 ; MD1.77@2603.84,527.15 2653.84,477.15
SD_CS: MD1.25@1503.84,1627.15 P2.8 | length 2217.7
  Top Layer w25: v1(2828.84,1309.65) 2903.84,1384.65 v1(2991.34,1384.65)
  Bottom Layer w25: MD1.25@1503.84,1627.15 1503.84,1559.65 1728.84,1334.65 2803.84,1334.65 v1(2828.84,1309.65) ; v1(2991.34,1384.65) 3328.84,1384.65 3366.34,1422.15 P2.8
SD_CS_A: P3.8 TFT1.19 | length 1236.5
  Top Layer w25: v2(4650,3150) 4876.51,3150 5203.84,2822.67 P3.8
  Bottom Layer w25: TFT1.19 4646.25,3153.75 v2(4650,3150)
SD_DI: MD1.26@1503.84,1727.15 P2.6 | length 2221.9
  Bottom Layer w15: MD1.26@1503.84,1727.15 1503.84,1722.15 1553.84,1672.15 1553.84,1584.65
  Bottom Layer w25: 1553.84,1584.65 1766.34,1372.15 2891.34,1372.15 2941.34,1322.15 P2.6
SD_DI_A: P3.6 TFT1.20 | length 1377.6
  Top Layer w25: v2(4550,3200) 4876.01,3200 5303.84,2772.17 P3.6
  Bottom Layer w25: TFT1.20 4550,3446.25 v2(4550,3200)
SD_DO: MD1.27@1403.84,1627.15 P2.4 | length 2487.6
  Top Layer w25: v1(2828.84,1234.65) 3016.34,1047.15 v1(3053.84,1047.15)
  Bottom Layer w25: MD1.27@1403.84,1627.15 1403.84,1584.65 1688.84,1299.65 2688.84,1299.65 2691.34,1297.15 ; 2641.34,1297.15 2766.34,1297.15 v1(2828.84,1234.65) ; v1(3053.84,1047.15) 3166.34,1159.65 3441.34,1159.65 P2.4
SD_DO_A: P3.4 TFT1.21 | length 1511.4
  Top Layer w25: v2(4450,3262.5) 4863,3262.5 5403.84,2721.66 P3.4
  Bottom Layer w25: TFT1.21 4446.25,3266.25 v2(4450,3262.5)
SD_SCK: MD1.28@1403.84,1727.15 P2.2 | length 2635.6
  Top Layer w25: v1(2828.84,1159.65) 3016.34,972.15 v1(3053.84,972.15)
  Bottom Layer w15: 1353.84,1584.65 1353.84,1684.65
  Bottom Layer w25: 1353.84,1584.65 1353.84,1559.65 1653.84,1259.65 2728.84,1259.65 v1(2828.84,1159.65) ; 1353.84,1684.65 1396.34,1727.15 MD1.28@1403.84,1727.15 ; v1(3053.84,972.15) 3203.84,1122.15 P2.2@3491.34,1122.15
SD_SCK_A: P3.2 TFT1.22 | length 1639.9
  Top Layer w25: v2(4350,3325) 4850,3325 5503.84,2671.16 P3.2
  Bottom Layer w25: v2(4350,3325) TFT1.22@4350,3446.25
STBYPIN: J5.1 MD1.31@1203.84,1627.15 | length 3039.7
  Top Layer w25: v1(2828.84,1072.15) 3053.84,847.15 v1(3053.84,772.15) v1@3066.34,772.15
  Bottom Layer w25: MD1.31@1203.84,1627.15 1211.34,1627.15 1616.34,1222.15 2678.84,1222.15 v1(2828.84,1072.15) ; v1(3053.84,772.15) 3516.34,309.65 J5.1
TEMPPIN: MD1.60@1703.84,427.15 S2.5 S2.6 S2.7 S2.8 | length 3005.9
  Top Layer w15: 1753.84,472.15 1753.84,572.15
  Top Layer w25: MD1.60@1691.34,434.65 1716.34,434.65 1753.84,472.15 ; 1753.84,572.15 1791.34,609.65 3028.84,609.65 3191.34,772.15 S2.5
  Bottom Layer w25: MD1.60@1703.84,427.15 MD1.60@1703.84,434.65 ; S2.5 S2.8
VCC: 
VREF: MD1.44@903.84,427.15
pads on no net: *1.0 Designator1.0 Designator2.0 MD1.1@1760.06,1350.57 MD1.2@1740.37,1350.57 MD1.3@1720.69,1350.57 MD1.4 MD1.5 MD1.6@1661.63,1350.57 MD1.7@1641.95,1350.57 MD1.8@1622.26,1350.57 MD1.9 MD1.10 MD1.11 MD1.12 MD1.13@1523.84,1350.57 MD1.14 MD1.15 MD1.16 MD1.17 MD1.18 MD1.19 MD1.20@1386.04,1350.57 MD1.21@1366.36,1350.57 MD1.22@1346.67,1350.57 MD1.23@1326.99,1350.57 MD1.24 MD1.25@1287.62,1350.57 MD1.26@1224.63,1287.58 MD1.27@1224.63,1267.89 MD1.28@1224.63,1248.21 MD1.29@1224.63,1228.52 MD1.30@1224.63,1208.84 MD1.31@1224.63,1189.15 MD1.32 MD1.33 MD1.34 MD1.35 MD1.36 MD1.37 MD1.38 MD1.39@1224.63,1031.67 MD1.40@1224.63,1011.99 MD1.41@1224.63,992.3 MD1.42@1224.63,972.62 MD1.43@1224.63,952.93 MD1.44@1224.63,933.25 MD1.45@1224.63,913.56 MD1.46@1224.63,893.88 MD1.47@1224.63,874.19 MD1.48@1224.63,854.51 MD1.49 MD1.50 MD1.51 MD1.52 MD1.53 MD1.54 MD1.55 MD1.56 MD1.57 MD1.58 MD1.59@1445.1,752.15 MD1.60@1464.78,752.15 MD1.61@1484.47,752.15 MD1.62@1504.15,752.15 MD1.63 MD1.64 MD1.65 MD1.66 MD1.67 MD1.68 MD1.69 MD1.70 MD1.71 MD1.72 MD1.73 MD1.74 MD1.75@1760.06,752.15 MD1.76@1823.05,815.14 MD1.77@1823.05,834.82 MD1.78@1823.05,854.51 MD1.79@1823.05,874.19 MD1.80@1823.05,893.88 MD1.81@1823.05,913.56 MD1.82@1823.05,933.25 MD1.83 MD1.84 MD1.85 MD1.86 MD1.87 MD1.88 MD1.89 MD1.90 MD1.91 MD1.92 MD1.93 MD1.94 MD1.95 MD1.96 MD1.97 MD1.98 MD1.99@1823.05,1267.89 MD1.100@1823.05,1287.58 P2.21 P2.23 P2.25 P2.26 P2.MH1 P2.MH2 P3.21 P3.23 P3.25 P3.26 P3.MH1 P3.MH2 R22.3 R24.3 S2.4 TFT1.R

## Polygon pours and split planes (outlines as drawn)
GND_A on Top Layer "Top Layer-No Net" (solid, remove dead copper, pour order 11): 3850,3550 3850,1475 5987.5,1475 5987.5,3550
GND on Top Layer "Top Layer-No Net" (solid, remove dead copper, shelved, pour order 17): 1.92,3551.78 0,3549.86 0,0 3842.93,0 3846.77,3.84 3846.77,3551.66 3846.26,3552.16
GND_A on Bottom Layer "Top Layer-No Net" (solid, remove dead copper, pour order 9): 3850,3550 3850,1462.5 5987.5,1462.5 5987.5,3550
GND on Bottom Layer "Top Layer-No Net" (solid, remove dead copper, shelved, pour order 12): 3.84,3547.15 3.84,1.12 1.92,-0.79 3843.26,-0.79 3845.97,1.92 3845.97,3542.51 3841.34,3547.15

## Keep-outs
Keep-Out Layer:
  lines w39.37: 3837.5,1500 3837.5,2187.5 ; 3837.5,2262.5 3837.5,2825 ; 3837.5,2900 3837.5,3512.5

## Silkscreen, mask and mechanical layers (free items; w line width, h text height)
Top Overlay:
  lines w10: 2603.84,1922.15 2841.34,1922.15 ; 2603.84,2022.15 2841.34,2022.15 ; 2603.84,1834.65 2841.34,1834.65 2841.34,2122.15 2616.34,2122.15 2603.84,2122.15 2603.84,1834.65
  lines w20: 1066.34,34.65 1553.84,34.65 1553.84,309.65 1066.34,309.65 1066.34,47.15 ; 1203.84,1859.65 1203.84,2134.65 ; 1228.84,34.65 1228.84,309.65 ; 1041.34,1859.65 1041.34,1872.15 1041.34,2134.65 1528.84,2134.65 1528.84,1859.65 1041.34,1859.65
  text "SMD SOLDERING STATION" at 728.84,3459.65 h100
  text "SMD SOLDERING STATION" at 4326.34,2972.15 h100
  text "MANOS MAR 120216" at 4451.34,2222.15 h100
  text "MANOS" at 266.34,2084.65 h150 r90
  text "K-TC" at 2616.34,2034.65 h100
  text "NTC" at 2641.34,1934.65 h100
  text "PTC" at 2641.34,1847.15 h100
  text "MANOS" at 4428.84,1759.65 h150
  text "MANOS MAR 120216" at 3353.84,1047.15 h100 r90
Mechanical 1:
  lines w10: 3838.84,3547.15 5990.61,3547.15 5990.61,1447.15 3846.6,1447.15 3846.6,9.1 3841.34,3.84 3.84,3.84 3.84,3547.15 4603.84,3547.15
  lines w39.37: 3837.5,1500 3837.5,2187.5 ; 3837.5,2262.5 3837.5,2825 ; 3837.5,2900 3837.5,3512.5

## Text inside footprints (layer, text, board x,y; h text height)
Designator1: Bottom Layer "M" at 1341.34,1147.15 h120; Bottom Layer "M" at 1166.34,972.15 h120
Designator2: Bottom Layer "M" at 4166.34,2109.65 h120; Bottom Layer "M" at 3991.34,1934.65 h120
Designator2: Top Overlay "M" at 2903.84,497.15 h120; Top Overlay "M" at 3078.84,322.15 h120
MD1: Top Overlay "DTR" at 2253.84,1014.65 h30; Top Overlay "RXD" at 2253.84,1114.65 h30; Top Overlay "TXD" at 2253.84,1214.65 h30; Top Overlay "VCC" at 2253.84,1314.65 h30; Top Overlay "GND" at 2253.84,1414.65 h30; Top Overlay "GND" at 2253.84,1514.65 h30
MDL1: Top Overlay "OUT-" at 696.25,2700 h50; Top Overlay "OUT+" at 706.25,2350 h50; Top Overlay "IN-" at 381.25,2700 h50; Top Overlay "IN+" at 381.25,2350 h50
MDL2: Top Overlay "OUT-" at 696.25,2231.25 h50; Top Overlay "OUT+" at 706.25,1881.25 h50; Top Overlay "IN-" at 381.25,2231.25 h50; Top Overlay "IN+" at 381.25,1881.25 h50
P1: Top Overlay "1" at 2778.84,184.65 h50; Top Overlay "2" at 2778.84,84.65 h50; Top Overlay "5" at 2403.84,184.65 h50; Top Overlay "6" at 2403.84,84.65 h50
P2: Top Overlay "2" at 3533.37,1032.38 h59.06 r90; Top Overlay "1" at 3633.37,1052.07 h59.06 r90; Top Overlay "26" at 3533.37,2372.54 h59.06 r90; Top Overlay "25" at 3633.37,2372.54 h59.06 r90
P3: Bottom Overlay "2" at 5593.6,2547.62 h59.06; Bottom Overlay "1" at 5573.92,2447.62 h59.06; Bottom Overlay "26" at 4253.44,2547.62 h59.06; Bottom Overlay "25" at 4253.44,2447.62 h59.06
TFT1: Top Overlay "SCL" at 3921.25,3290.43 h20 r45; Top Overlay "SDA" at 4021.25,3295.43 h20 r45; Top Overlay "IOREF" at 4401.25,1637.07 h20 r45; Top Overlay "RESET" at 4506.25,1637.07 h20 r45; Top Overlay "3v3" at 4606.25,1637.07 h20 r45; Top Overlay "5v" at 4706.25,1637.07 h20 r45; Top Overlay "GND" at 4806.25,1637.07 h20 r45; Top Overlay "GND" at 4906.25,1637.07 h20 r45; Top Overlay "Vin" at 5006.25,1637.07 h20 r45; Top Overlay "AD0" at 5206.25,1637.07 h20 r45; Top Overlay "AD1" at 5306.25,1637.07 h20 r45; Top Overlay "AD2" at 5406.25,1637.07 h20 r45; Top Overlay "AD3" at 5506.25,1637.07 h20 r45; Top Overlay "AD4" at 5606.25,1637.07 h20 r45; Top Overlay "AD5" at 5706.25,1637.07 h20 r45; Top Overlay "IO0" at 5686.25,3300.43 h20 r45; Top Overlay "IO1" at 5586.25,3300.43 h20 r45; Top Overlay "LCD_D2" at 5486.25,3300.43 h20 r45; Top Overlay "LCD_D3" at 5386.25,3300.43 h20 r45; Top Overlay "LCD_D4" at 5286.25,3300.43 h20 r45; Top Overlay "LCD_D5" at 5186.25,3300.43 h20 r45; Top Overlay "LCD_D6" at 5086.25,3300.43 h20 r45; Top Overlay "LCD_D7" at 4986.25,3300.43 h20 r45; Top Overlay "LCD_D0" at 4821.25,3297.5 h20 r45; Top Overlay "LCD_D1" at 4721.25,3297.5 h20 r45; Top Overlay "SD_CS" at 4621.25,3297.5 h20 r45; Top Overlay "SD_DI" at 4521.25,3290.43 h20 r45; Top Overlay "SD_DO" at 4421.25,3290.43 h20 r45; Top Overlay "SD_SCK" at 4321.25,3290.43 h20 r45; Top Overlay "GND" at 4221.25,3290.43 h20 r45; Top Overlay "AREF" at 4121.25,3290.43 h20 r45